# Altium PCB RYA_MotorDriver.PcbDoc
Units mm, origin at the board's own origin, x right, y up, seen from the top; angles counter-clockwise.
Board outline 42.67 x 29.5 mm, 2 copper layers (Top Layer, Bottom Layer); 33 components, 30 nets, 95 pads, 90 vias.
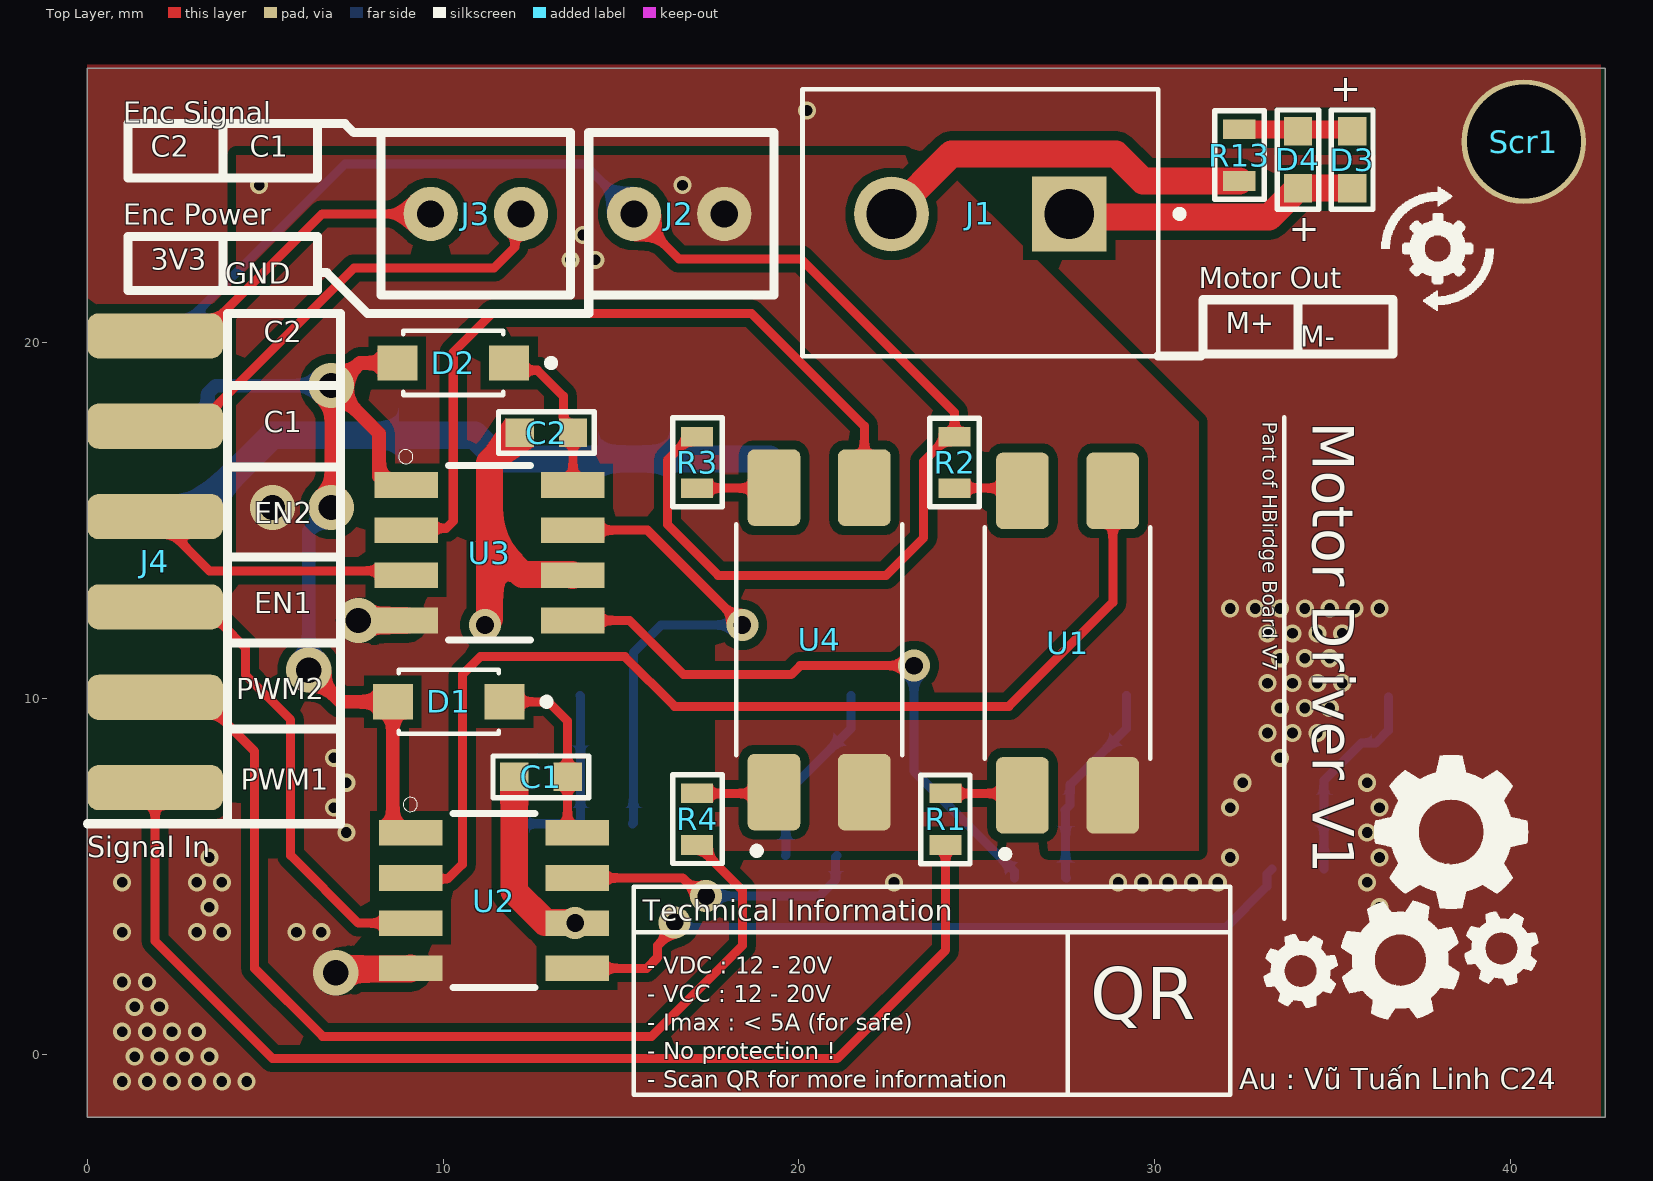
[diagram p0: Top Layer view]
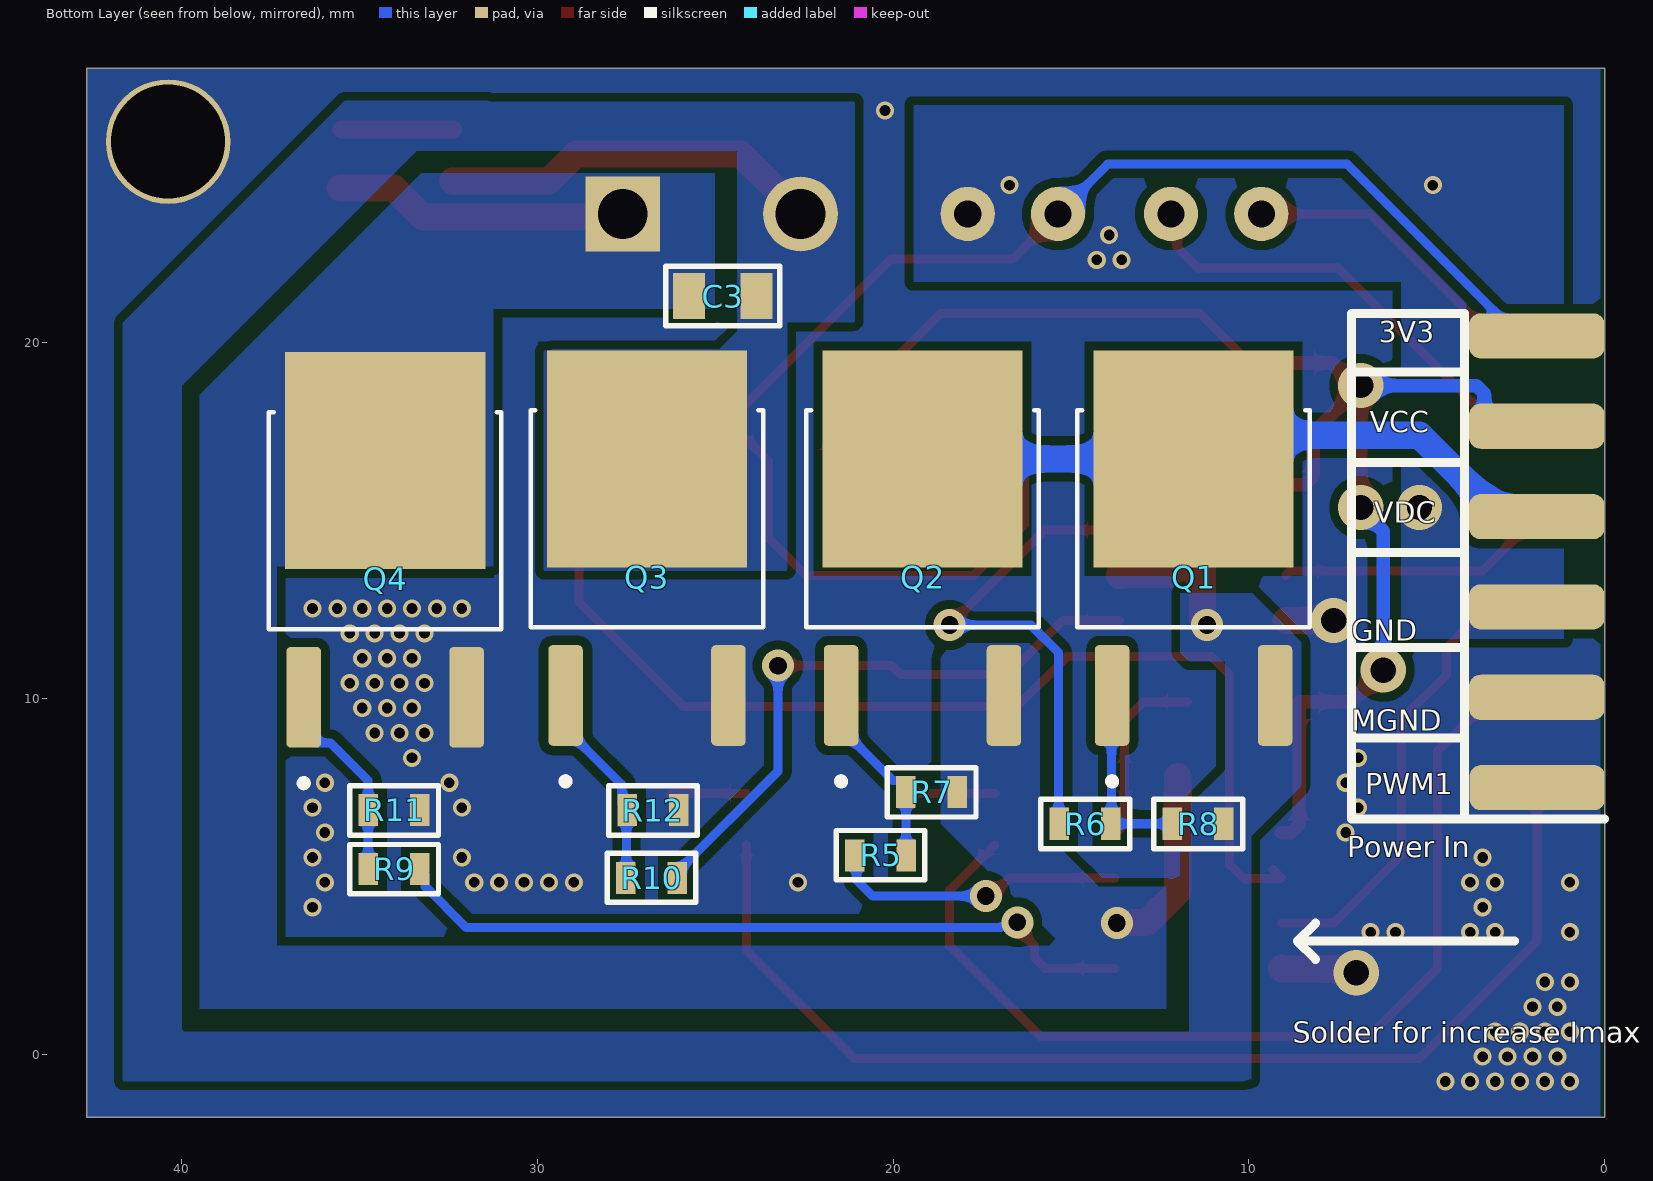
[diagram p1: Bottom Layer view, seen from below]
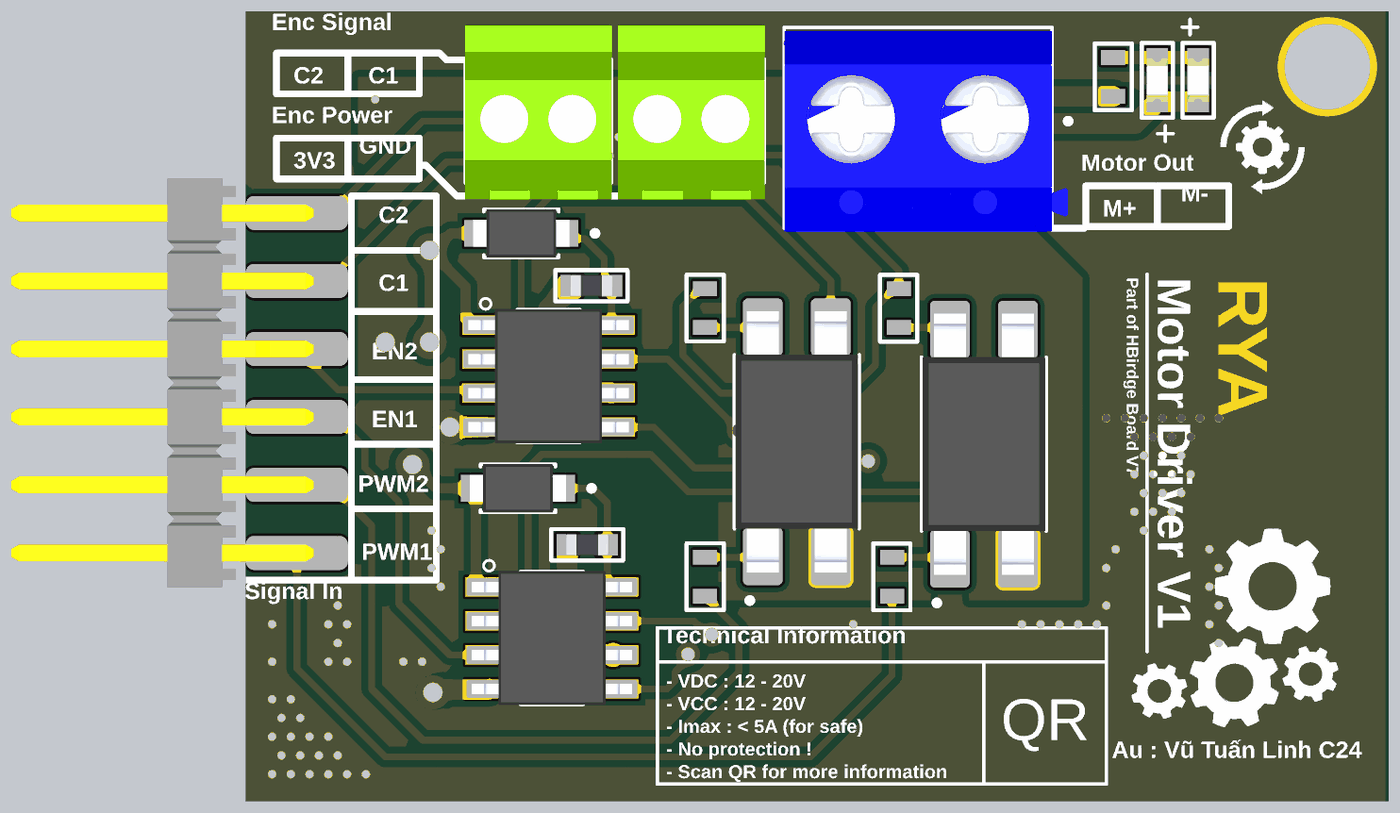
[diagram p2: 3D render of the assembled board from above, using the file's embedded part models]

## Layer stack, top to bottom
Top Solder: solder mask 0.0102, Solder Resist, Dk 3.5
Top Layer: signal copper 0.0356
Dielectric 1: dielectric 0.32, FR-4, Dk 4.8
Bottom Layer: signal copper 0.0356
Bottom Solder: solder mask 0.0102, Solder Resist, Dk 3.5

## Board outline
0,-1.778 0,27.722 42.672,27.722 42.672,-1.778

## Design rules (kind name [scope] priority, off if disabled: settings)
Clearance [All] p1: gap=0.254 ignorepadtopadclearanceinfootprint=FALSE
PolygonConnect [All] p1: connectstyle=Direct reliefconductorwidth=0.254 reliefentries=4 polygonreliefangle="90 Angle" airgapwidth=0.254
RoutingVias [All] p1: holewidth=0.711 width=1.27 viastyle="Through Hole" minholewidth=0.711 minwidth=1.27 maxholewidth=0.711 maxwidth=1.27
SolderMaskExpansion [All] p1: expansion=0.102 istentingtop=FALSE
SupplyNets "Schematic Supply Nets_5" [InNet('3V3')] p1: voltage=0.000
SupplyNets "Schematic Supply Nets_4" [InNet('MGND')] p2: voltage=0.000
SupplyNets "Schematic Supply Nets_3" [InNet('VDC')] p3: voltage=0.000
SupplyNets "Schematic Supply Nets_1" [InNet('GND')] p4: voltage=0.000
SupplyNets "Schematic Supply Nets" [InNet('VCC')] p5: voltage=0.000
Width "Schematic Width Constraint" [InNetClass('Motor Power')] p1: maxlimit=2.54 minlimit=0.762 preferedwidth=0.762
Width [All] p2: maxlimit=1.254 minlimit=0.254 preferedwidth=0.254
30 further rules are at their usual default settings.

## Classes and differential pairs
net class "Motor Power": MGND NetC1_2 NetC2_1 VDC
component class U_MotorDriver: C1 C2 C3 D1 D2 D3 D4 Q1 Q2 Q3 Q4 R1 R2 R3 R4 R5 R6 R7 R8 R9 R10 R11 R12 R13 U1 U2 U3 U4
component class TopLevelDesgin: J1 J2 J3 J4 Scr1

## Components (designator, comment, footprint, x,y, rotation, side; value= is the part's Value field where it differs from the comment)
C1 "010603226106.3" CAP_0603 12.7,7.874 r180 top value=22µF
C2 "010603226106.3" CAP_0603 12.954,17.399 r0 top value=22µF
C3 "0108051031050" CAP_0805 24.765,21.336 r180 bottom value=10nF
D1 "1N5819W" 1N5819W 10.16,9.906 r180 top
D2 "1N5819W" 1N5819W 10.287,19.431 r180 top
D3 "160603GreenClear" WL-SMCW_0603_H=0.7mm 35.56,25.146 r90 top value="Green, 3.2V"
D4 "160603BlueClear" WL-SMCW_0603_H=0.7mm 34.036,25.146 r270 top value="Blue, 3.2V"
J1 "KF301-2P" HANDSON_KF301-2P 25.106,23.622 r180 top
J2 "KF120-2" KF120-2-Footprint-1 17.907,23.622 r270 top
J3 "KF120-2" KF120-2-Footprint-1 12.192,23.622 r270 top
J4 "90StraightHeader" Header90Degree 1.905,20.193 r0 top
Q1 "IRLR7843TRPBF" TO229P990X239-3_4N 11.557,14.224 r90 bottom
Q2 "IRLR7843TRPBF" TO229P990X239-3_4N 19.177,14.224 r90 bottom
Q3 "IRLR7843TRPBF" TO229P990X239-3_4N 26.924,14.224 r90 bottom
Q4 "IRLR7843TRPBF" TO229P990X239-3_4N 34.286,14.173 r90 bottom
R1 "0006031011" resistor_0603 24.13,6.604 r90 top value="100 Ohm, 1/4 W"
R2 "0006031021" resistor_0603 24.384,16.637 r90 top value="1 KOhm, 1/4 W"
R3 "0006031021" resistor_0603 17.145,16.637 r270 top value="1 KOhm, 1/4 W"
R4 "0006031011" resistor_0603 17.145,6.604 r270 top value="100 Ohm, 1/4 W"
R5 "0006031011" resistor_0603 20.357,5.588 r180 bottom value="100 Ohm, 1/4 W"
R6 "0006031011" resistor_0603 14.605,6.477 r0 bottom value="100 Ohm, 1/4 W"
R7 "0006031031" resistor_0603 18.923,7.366 r0 bottom value="10 KOhm, 1/4 W"
R8 "0006031031" resistor_0603 11.43,6.477 r0 bottom value="10 KOhm, 1/4 W"
R9 "0006031011" resistor_0603 34.036,5.207 r0 bottom value="100 Ohm, 1/4 W"
R10 "0006031011" resistor_0603 26.797,4.953 r180 bottom value="100 Ohm, 1/4 W"
R11 "0006031031" resistor_0603 34.036,6.858 r0 bottom value="10 KOhm, 1/4 W"
R12 "0006031031" resistor_0603 26.76,6.858 r0 bottom value="10 KOhm, 1/4 W"
R13 "0006031021" resistor_0603 32.385,25.273 r270 top value="1 KOhm, 1/4 W"
Scr1 "MP3.2" MP3.2 40.386,25.654 r0 top
U1 "PC817X2NIP1B" SOIC254P960X420-4N 27.559,11.557 r90 top
U2 "IR2104SPBF" IR2104SPBF 11.43,4.318 r0 top
U3 "IR2104SPBF" IR2104SPBF 11.303,14.097 r0 top
U4 "PC817X2NIP1B" SOIC254P960X420-4N 20.574,11.646 r90 top

## Footprints (in the part's own frame and the unit in brackets; to place one, negate y for a bottom-side part, rotate by r counter-clockwise, add the part's x,y. Pads: shape width x height; smd on the part's side, far side on the other; paste and mask are expansions set on the pad)
1N5819W [mm]
  rect 1.12x0.99 smd: A(1.57,0) K(-1.57,0)
  silkscreen extent -2.85,-0.9 1.4,0.9, body extent -1.8,-0.9 1.8,0.9, height 1.1
CAP_0603 [mm]
  rect 0.8x0.8 smd: 1(-0.801,0.076) 2(0.699,0.076)
  silkscreen extent -1.4,-0.51 1.3,0.66, body extent -0.85,-0.32 0.75,0.48, height 0.8
CAP_0805 [mm]
  rect 0.9x1.3 smd: 1(-0.975,-0.025) 2(0.925,-0.025)
  silkscreen extent -1.63,-0.86 1.57,0.81, body extent -1.03,-0.65 0.97,0.6, height 0.6
HANDSON_KF301-2P [mm]
  rect 2.1x2.1 hole 1.4: 1(-2.5,0)
  round 2.1 hole 1.4: 2(2.5,0)
  silkscreen extent -5.7,-3.5 5,4, body extent -5.6,-3.37 5,4.13, height 10.13
Header90Degree [mm]
  rrect50% 3.81x1.27 smd: 1(0,0) 2(0,-2.54) 3(0,-5.08) 4(0,-7.62) 5(0,-10.16) 6(0,-12.7)
  rrect50% 3.81x1.27 smd far side: 7(-0.014,-12.701) 8(0,-10.16) 9(0,-7.62) 10(0,-5.08) 11(0,-2.54) 12(0,0)
  body extent -10.67,-13.97 0.64,1.27, height 2.54
IR2104SPBF [mm]
  rect 1.78x0.72 smd paste-2: 1(-2.34,1.905) 2(-2.34,0.635) 3(-2.34,-0.635) 4(-2.34,-1.905) 5(2.34,-1.905) 6(2.34,-0.635) 7(2.34,0.635) 8(2.34,1.905)
  silkscreen extent -2.55,-2.45 1.15,2.9, body extent -3,-2.5 3,2.5, height 1.75
KF120-2-Footprint-1 [mil]
  round 60 hole 30: 1(0,0) 2(0,-100)
  body extent -141,-158 115,58, height 335
MP3.2 [mm]
  round 3.5 hole 3.2: 1(0,0)
  body extent -2.75,-2.75 2.74,2.75, height 2.98
resistor_0603 [mm]
  rect 0.55x0.9 smd: 1(-0.725,0) 2(0.725,0)
  silkscreen extent -1.25,-0.69 1.24,0.7, body extent -0.8,-0.45 0.8,0.45, height 0.5
SOIC254P960X420-4N [mm]
  rrect25% 2.15x1.48 smd: 1(-4.28,1.27) 2(-4.28,-1.27) 3(4.28,-1.27) 4(4.28,1.27)
  silkscreen extent -6.03,-2.33 3.25,2.33, body extent -4.87,-2.29 4.87,2.29, height 4
TO229P990X239-3_4N [mm]
  rrect25% 2.83x0.97 smd: 1(-4.14,2.29) 3(-4.14,-2.29)
  rect 6.1x5.63 smd paste-4: 4(2.51,0)
  silkscreen extent -6.65,-3.27 3.87,3.27, body extent -4.95,-3.27 4.95,3.27, height 2.39
WL-SMCW_0603_H=0.7mm [mm] "SMD Mono-color Chip LED, body 1.6x0.8mm"
  rect 0.8x0.8 smd: 1(-0.8,0) 2(0.8,0)
  silkscreen extent -1.4,-0.58 1.4,0.58, body extent -0.8,-0.4 0.8,0.4, height 0.7

## Part data
C1 C2: library part CMP-001-00237-1, "CAP, size 0603, 22 uF, 6.3 VDC", Manufacture Name="Samsung Electro-Mechanics", Manufacture SN=CL10A226KQ8NRNE, Operating Temperature="-55 to +125degC", Tolerance=10%, Voltage Rating DC="6.3 VDC", Component Type=Standard, Design Item ID=010603226106.3, Mounting Technology=SMT, Packaging="Tape and Reel", Pins=2, Size=0603, Source=Capacitor_0603_10_percent.SchLib, Supplier 1 Name=Mouser, Supplier 1 SN=187-CL10A226KQ8NRNE, Supplier 1 URL=https://www.mouser.vn/ProductDetail/Samsung-Electro-Mechanics/CL10A226KQ8NRNE?qs=NrXEK%2Fuukt63rpgsAsB8kg%3D%3D&utm_source=mouser-refine-download&utm_medium=file&utm_campaign=CL10A226KQ8NRNE&utm_content=Samsung-Electro-Mechanics, Supplier 2 Name=Digi-Key, Supplier 2 SN=1276-2867-2-ND, Supplier 2 URL=https://www.digikey.com/en/products/detail/samsung-electro-mechanics/cl10a226kq8nrne/3888525, Supplier 3 Name=thegioiic, Supplier 3 SN=N/A, Supplier 3 URL=N/A
C3: library part CMP-001-00258-1, "CAP, size 0805, 10 nF, 50 VDC", Manufacture Name=TDK, Manufacture SN=CGA4C2C0G1H103J060AA, Operating Temperature="-55 to +125degC", Tolerance=5%, Voltage Rating DC="50 VDC", Component Type=Standard, Design Item ID=0108051031050, Mounting Technology=SMT, Packaging="Tape and Reel", Pins=2, Size=0805, Source=Capacitor_0805_5_percent.SchLib, Supplier 1 Name=Mouser, Supplier 1 SN=810-CGA4C2C0G1H103J, Supplier 1 URL=https://www.mouser.vn/ProductDetail/TDK/CGA4C2C0G1H103J060AA?qs=FxQuwy19cyC9M6v0nMqjhA%3D%3D&utm_source=mouser-refine-download&utm_medium=file&utm_campaign=CGA4C2C0G1H103J060AA&utm_content=TDK, Supplier 2 Name=Digi-Key, Supplier 2 SN=445-6947-2-ND, Supplier 2 URL=https://www.digikey.com/en/products/detail/tdk-corporation/cga4c2c0g1h103j060aa/2672840, Supplier 3 Name=thegioiic, Supplier 3 SN=OEM, Supplier 3 URL=N/A
D1 D2: library part CMP-004-00113-1, Component Type=Standard, Design Item ID=1N5819W, Pins=2, Source=1N5819W.SchLib
D3: library part CMP-004-00090-1, "WL-SMCW SMT Mono-color Chip LED Waterclear, size 0603, Green, 3.2V, 140deg", Color=Green, Component Type=Standard, ComponentLink1Description="Datasheet link", ComponentLink1URL=N/A, ComponentLink2Description="Supplier 1 URL", ComponentLink2URL=https://www.mouser.vn/ProductDetail/Wurth-Elektronik/150060GS75000?qs=LlUlMxKIyB0UYkq5lDO8nA%3D%3D, ComponentLink3Description="Supplier 2 URL", ComponentLink3URL=https://www.digikey.com/en/products/detail/liteon/LTST-C191KGKT/386835, ComponentLink4Description="Supplier 3 URL", ComponentLink4URL=https://www.thegioiic.com/led-xanh-la-0603-dan-smd-trong-suot, Design Item ID=160603GreenClear, Pins=2, Size=0603, Source=WL-SMCW_0603.SchLib, Supplier 1 Name=Mouser, Supplier 1 SN=710-150060GS75000, Supplier 1 URL=https://www.mouser.vn/ProductDetail/Wurth-Elektronik/150060GS75000?qs=LlUlMxKIyB0UYkq5lDO8nA%3D%3D, Supplier 2 Name=Digi-Key, Supplier 2 SN=160-1446-2-ND, Supplier 2 URL=https://www.digikey.com/en/products/detail/liteon/LTST-C191KGKT/386835, Supplier 3 Name=ICDayRoi, Supplier 3 SN=N/A, Supplier 3 URL=https://www.thegioiic.com/led-xanh-la-0603-dan-smd-trong-suot, Type=Clear
D4: library part CMP-004-00088-1, "WL-SMCW SMT Mono-color Chip LED Waterclear, size 0603, Blue, 3.2V, 140deg", Color=Blue, Component Type=Standard, ComponentLink1Description="Datasheet link", ComponentLink1URL=N/A, ComponentLink2Description="Supplier 1 URL", ComponentLink2URL=https://www.mouser.vn/ProductDetail/Wurth-Elektronik/150060BS75003?qs=Li%252BoUPsLEnu8LvIbM48DKA%3D%3D, ComponentLink3Description="Supplier 2 URL", ComponentLink3URL=https://www.digikey.com/en/products/detail/liteon/LTST-C191TBKT/388530, ComponentLink4Description="Supplier 3 URL", ComponentLink4URL=https://www.thegioiic.com/led-xanh-duong-0603-dan-smd-trong-suot, Design Item ID=160603BlueClear, Pins=2, Size=0603, Source=WL-SMCW_0603.SchLib, Supplier 1 Name=Mouser, Supplier 1 SN=710-150060GS75000, Supplier 1 URL=https://www.mouser.vn/ProductDetail/Wurth-Elektronik/150060BS75003?qs=Li%252BoUPsLEnu8LvIbM48DKA%3D%3D, Supplier 2 Name=Digi-Key, Supplier 2 SN=160-1647-2-ND, Supplier 2 URL=https://www.digikey.com/en/products/detail/liteon/LTST-C191TBKT/388530, Supplier 3 Name=ICDayRoi, Supplier 3 SN=N/A, Supplier 3 URL=https://www.thegioiic.com/led-xanh-duong-0603-dan-smd-trong-suot, Type=Clear
J1: library part CMP-118-000001-1, "2 Pin Terminal Block 5mm Pitch", Package=None, Availability=Unavailable, Design Item ID=KF301-2P, MP=KF301-2P, Price=None, Source=KF301-2P.SchLib
J2 J3: library part CMP-118-000003-2, "2.54mm Terminal"
J4: library part CMP-118-000004-6
Q1 Q2 Q3 Q4: library part CMP-123-000003-1, "RoHS Compliant", Package="TO-252-3 Infineon", Availability="In Stock", Check_prices=https://www.snapeda.com/parts/IRLR7843TRPBF/Infineon+Technologies/view-part/?ref=eda, Component Type=Standard, Design Item ID=IRLR7843TRPBF, MF="Infineon Technologies", MP=IRLR7843TRPBF, Pin Count=3, Price=None, Purchase-URL=https://pricing.snapeda.com/search/part/IRLR7843TRPBF/?ref=eda, SnapEDA_Link=https://www.snapeda.com/parts/IRLR7843TRPBF/Infineon+Technologies/view-part/?ref=snap, Source=IRLR7843TRPBF.SchLib
R1 R4 R5 R6 R9 R10: library part CMP-009-00184-1, "RES, size 0603, 100 Ohm, 1/4 W", Manufacture  Name=OEM, Rated Power="1/4 W", Resistance Tolerance=+/-1%, Component Type=Standard, ComponentLink1Description="Datasheet link", ComponentLink1URL=https://www.yageo.com/upload/media/product/productsearch/datasheet/rchip/PYu-SR_20105_RoHS_L_10.pdf, ComponentLink2Description="Supplier 1 URL", ComponentLink2URL=N/A, ComponentLink3Description="Supplier 2 URL", ComponentLink3URL=https://www.digikey.com/en/products/detail/yageo/SR0603FR-7T100RL/9373096https://www.digikey.com/en/products/detail/yageo/SR0603FR-7T100RL/9373096, ComponentLink4Description="Supplier 3 URL", ComponentLink4URL=N/A, Design Item ID=0006031011, Manufacture  SN=OEM, Mounting Technology=SMT, Pins=2, Size=0603, Source=Resistor_0603.SchLib, Supplier 1 Name=Mouser, Supplier 1 SN=603-SR0603FR-7T100RL, Supplier 1 URL=https://www.mouser.vn/ProductDetail/YAGEO/SR0603FR-7T100RL?qs=sGAEpiMZZMvdGkrng054tz1y1XEHv7sNOEBvi%2FAEoxbcgRjDGFawVw%3D%3D, Supplier 2 Name=Digi-Key, Supplier 2 SN="YAG5822TR-ND YAG5822CT-ND YAG5822DKR-ND", Supplier 2 URL=https://www.digikey.com/en/products/detail/yageo/SR0603FR-7T100RL/9373096https://www.digikey.com/en/products/detail/yageo/SR0603FR-7T100RL/9373096, Supplier 3 Name=thegioiic, Supplier 3 SN=N/A, Supplier 3 URL=N/A
R2 R3 R13: library part CMP-009-00186-1, "RES, size 0603, 1 KOhm, 1/4 W", Manufacture  Name=OEM, Rated Power="1/4 W", Resistance Tolerance=+/-1%, Component Type=Standard, ComponentLink1Description="Datasheet link", ComponentLink1URL=https://www.yageo.com/upload/media/product/productsearch/datasheet/rchip/PYu-SR_20105_RoHS_L_10.pdf, ComponentLink2Description="Supplier 1 URL", ComponentLink2URL=N/A, ComponentLink3Description="Supplier 2 URL", ComponentLink3URL=https://www.digikey.com/en/products/detail/yageo/SR0603FR-7T1KL/9373103, ComponentLink4Description="Supplier 3 URL", ComponentLink4URL=N/A, Design Item ID=0006031021, Manufacture  SN=OEM, Mounting Technology=SMT, Pins=2, Size=0603, Source=Resistor_0603.SchLib, Supplier 1 Name=Mouser, Supplier 1 SN=71-RCS06031K00FKEA, Supplier 1 URL=https://www.mouser.vn/ProductDetail/Vishay-Dale/RCS06031K00FKEA?qs=sGAEpiMZZMvdGkrng054t9clqp6gtJJdzI9PGMrTQi4RTIuHToNahw%3D%3D, Supplier 2 Name=Digi-Key, Supplier 2 SN="YAG5829TR-ND YAG5829CT-ND YAG5829DKR-ND", Supplier 2 URL=https://www.digikey.com/en/products/detail/yageo/SR0603FR-7T1KL/9373103, Supplier 3 Name=thegioiic, Supplier 3 SN=N/A, Supplier 3 URL=N/A
R7 R8 R11 R12: library part CMP-009-00188-1, "RES, size 0603, 10 KOhm, 1/4 W", Manufacture  Name=OEM, Rated Power="1/4 W", Resistance Tolerance=+/-1%, Component Type=Standard, ComponentLink1Description="Datasheet link", ComponentLink1URL=https://fscdn.rohm.com/en/products/databook/datasheet/passive/resistor/chip_resistor/esr-e.pdf, ComponentLink2Description="Supplier 1 URL", ComponentLink2URL=N/A, ComponentLink3Description="Supplier 2 URL", ComponentLink3URL=https://www.digikey.com/en/products/detail/rohm-semiconductor/ESR03EZPF1002/1983429, ComponentLink4Description="Supplier 3 URL", ComponentLink4URL=N/A, Design Item ID=0006031031, Manufacture  SN=OEM, Mounting Technology=SMT, Pins=2, Size=0603, Source=Resistor_0603.SchLib, Supplier 1 Name=Mouser, Supplier 1 SN=755-ESR03EZPF1002, Supplier 1 URL=https://www.mouser.vn/ProductDetail/ROHM-Semiconductor/ESR03EZPF1002?qs=sGAEpiMZZMvdGkrng054t67Efho1F8r6CDeAsqwFse8%3D, Supplier 2 Name=Digi-Key, Supplier 2 SN="RHM10KADTR-ND RHM10KADCT-ND RHM10KADDKR-ND", Supplier 2 URL=https://www.digikey.com/en/products/detail/rohm-semiconductor/ESR03EZPF1002/1983429, Supplier 3 Name=thegioiic, Supplier 3 SN=N/A, Supplier 3 URL=N/A
Scr1: library part CMP-143-000000-1, Component Type=Standard, Design Item ID=MP3.2, Pin Count=1, Source=MP_3P2.SchLib
U1 U4: library part CMP-036-000026-1, "Optocoupler DC-IN 1-CH Transistor DC-OUT 4-Pin DIP SMD T/R", Package="SMD-4 Sharp Microelectronics", Check_prices=https://www.snapeda.com/parts/PC817X2NIP1B/Sharp+Microelectronics/view-part/?ref=eda, Design Item ID=PC817X2NIP1B, MF="Sharp Microelectronics", MP=PC817X2NIP1B, SnapEDA_Link=https://www.snapeda.com/parts/PC817X2NIP1B/Sharp+Microelectronics/view-part/?ref=snap, Source=PC817X2NIP1B.SchLib
U2 U3: library part CMP-031-00014-2, "Half-Bridge Gate Driver IC Non-Inverting 8-SOIC", Case/Package="SOIC-8 Infineon", Check_prices=https://www.snapeda.com/parts/IR2104SPBF/Infineon/view-part/?ref=eda, Component Type=Standard, Design Item ID=IR2104SPBF, MF=Infineon, MP=IR2104SPBF, Pins=8, SnapEDA_Link=https://www.snapeda.com/parts/IR2104SPBF/Infineon/view-part/?ref=snap, Source=IR2104SPBF.SchLib

## Via types
v1: diameter 0.508, hole 0.3, Top Layer to Bottom Layer, tented both sides, 78 vias
v2: diameter 1.27, hole 0.711, Top Layer to Bottom Layer, tented both sides, 6 vias
v3: diameter 0.9, hole 0.5, Top Layer to Bottom Layer, tented both sides, 5 vias
v4: diameter 0.9, hole 0.5, Top Layer to Bottom Layer, 1 vias

## Nets (pads, with @x,y where several pads share a name; then routed paths per layer and width w, separated by ;. In a path a pad name is that pad's centre, name@x,y a point inside that pad or via, vN(x,y) a via of type N, cw(c..) or ccw(c..) an arc to the next point about the centre after c; other vN are vias at no path point)
3V3: J2.2 J4.12 R2.2 R3.1 | length 42.5
  Top Layer w0.254: J2.2 16.637,22.352 20.066,22.352 24.384,18.034 R2.2 24.209,17.362 23.513,16.666 23.513,14.518 22.457,13.462 17.736,13.462 16.314,14.884 16.314,16.706 16.97,17.362 R3.1
  Bottom Layer w0.254: J4.12 2.413,20.193 7.239,25.019 13.97,25.019 J2.2
EN1: J4.4 U2.3 | length 13.5
  Top Layer w0.254: J4.4 2.137,12.341 3.51,12.341 3.772,12.079 3.796,12.079 4.445,11.43 4.445,10.668 5.715,9.398 5.715,5.588 7.62,3.683 U2.3
EN2: J4.3 U3.3 | length 7.7
  Top Layer w0.254: J4.3 3.429,13.589 8.836,13.589 U3.3
ENC_C1: J3.1 J4.2 | length 13.2
  Top Layer w0.254: J4.2 3.072,17.653 3.669,18.25 3.669,18.274 7.493,22.098 11.43,22.098 12.019,22.687 12.019,23.449 J3.1
ENC_C2: J3.2 J4.1 | length 9.2
  Top Layer w0.254: J4.1 3.175,20.193 6.604,23.622 J3.2
GND: J2.1 J4.9 U1.2 U4.2
  other v1: 13.58,22.33 14.28,22.33 13.93,23.03 4.83,24.43 16.73,24.43
  other v2: 5.207,15.367
MGND: J4.7 J4.8 Q3.3 Q4.3 R11.1 R12.1 Scr1.1 U2.4 U3.4 | length 3.5
  Top Layer w0.762: v2(6.985,2.286) 7.122,2.286 7.228,2.392 9.069,2.392 U2.4 ; v2(7.62,12.192) U3.4
  other v1: 0.98,-0.77 1.68,-0.77 2.38,-0.77 3.08,-0.77 3.78,-0.77 4.48,-0.77 1.33,-0.07 2.03,-0.07 2.73,-0.07 3.43,-0.07 0.98,0.63 1.68,0.63 2.38,0.63 3.08,0.63 1.33,1.33 2.03,1.33 0.98,2.03 1.68,2.03 0.98,3.43 3.08,3.43 3.78,3.43 5.88,3.43 6.58,3.43 3.43,4.13 36.33,4.13 0.98,4.83 3.08,4.83 3.78,4.83 22.68,4.83 28.98,4.83 29.68,4.83 30.38,4.83 31.08,4.83 31.78,4.83 35.98,4.83 3.43,5.53 32.13,5.53 36.33,5.53 7.28,6.23 35.98,6.23 6.93,6.93 32.13,6.93 36.33,6.93 7.28,7.63 32.48,7.63 35.98,7.63 6.93,8.33 33.53,8.33 33.18,9.03 33.88,9.03 34.58,9.03 33.53,9.73 34.23,9.73 34.93,9.73 33.18,10.43 33.88,10.43 34.58,10.43 35.28,10.43 33.53,11.13 34.23,11.13 34.93,11.13 33.18,11.83 33.88,11.83 34.58,11.83 35.28,11.83 32.13,12.53 32.83,12.53 33.53,12.53 34.23,12.53 34.93,12.53 35.63,12.53 36.33,12.53 20.23,26.53
NetC1_1: C1.1 D1.K U2.8 | length 5.3
  Top Layer w0.254: D1.K 12.954,9.906 13.501,9.359 C1.1 13.501,6.456 13.734,6.223 U2.8
NetC1_2: C1.2 C3.1 D3.1 D4.2 J1.1 Q2.3 Q4.4 R7.1 U2.6 | length 13.7
  Top Layer w0.762: C1.2 12.001,4.574 12.871,3.704 U2.6@13.749,3.704 ; J1.1 27.696,23.532 33.222,23.532 D4.2 D3.1
  other v4: 13.716,3.683
NetC2_1: C2.1 C3.2 J1.2 Q1.3 Q3.4 R8.1 R13.2 U3.6 | length 19.3
  Top Layer w0.762: v3(11.176,12.065) 11.176,12.102 11.303,12.229 11.303,14.416 ; C2.1 11.303,16.625 11.303,14.416 ; U3.6 13.622,13.483 12.236,13.483 11.303,14.416 ; J1.2 24.291,25.307 28.919,25.307 29.678,24.548 R13.2
NetC2_2: C2.2 D2.K U3.8 | length 4.5
  Top Layer w0.254: D2.K 12.06,19.228 12.649,19.228 13.38,18.497 13.38,17.748 C2.2 13.653,16.012 U3.8
NetD3_2: D3.2 D4.1 R13.1 | length 3.2
  Top Layer w0.254: D3.2@35.508,25.998 D3.2
  Top Layer w0.508: R13.1 D3.2@35.508,25.998
NetQ1_1: Q1.1 R6.1 R8.2 | length 5.3
  Bottom Layer w0.254: R8.2 R6.1 13.864,6.493 13.864,10.068 Q1.1
NetQ2_1: Q2.1 R5.2 R7.2 | length 5.4
  Bottom Layer w0.254: R5.2 19.64,5.596 19.64,7.533 19.796,7.689 20.002,7.689 21.467,9.154 Q2.1
NetQ3_1: Q3.1 R10.1 R12.2 | length 5.9
  Bottom Layer w0.254: R10.1 27.503,4.972 27.503,6.84 R12.2 27.633,7.006 27.633,7.573 29.214,9.154 Q3.1
NetQ4_1: Q4.1 R9.2 R11.2 | length 5.8
  Bottom Layer w0.254: R9.2 34.761,7.689 35.817,8.745 36.218,8.745 36.576,9.103 Q4.1
NetR1_2: R1.2 U1.1 | length 2.2
  Top Layer w0.254: R1.2 26.237,7.329 U1.1
NetR2_1: R2.1 U1.4 | length 1.9
  Top Layer w0.254: R2.1 26.214,15.912 U1.4
NetR3_2: R3.2 U4.4 | length 2.2
  Top Layer w0.254: R3.2 19.29,15.912 U4.4
NetR4_1: R4.1 U4.1 | length 2.2
  Top Layer w0.254: R4.1 19.267,7.329 U4.1
NetR5_1: R5.1 U2.7 | length 8.4
  Top Layer w0.254: U2.7 16.732,4.953 17.24,4.445 v3(17.399,4.445)
  Bottom Layer w0.254: v3(17.399,4.445) 20.574,4.445 21.035,4.906 21.035,5.541 R5.1
NetR6_2: R6.2 U3.7 | length 14.1
  Top Layer w0.254: U3.7 15.748,14.732 v3(18.415,12.065)
  Bottom Layer w0.254: R6.2 15.349,6.496 15.349,11.285 16.129,12.065 v3(18.415,12.065)
NetR9_1: R9.1 U2.5 | length 21.3
  Top Layer w0.254: U2.5 15.726,2.413 16.03,2.716 16.03,3.049 16.512,3.531 v3(16.512,3.706)
  Bottom Layer w0.254: v3(16.512,3.706) 16.636,3.583 16.958,3.583 16.984,3.556 32.004,3.556 33.163,4.715 33.163,5.059 R9.1
NetR10_2: R10.2 U3.5 | length 17.5
  Top Layer w0.254: U3.5 15.24,12.192 16.764,10.668 19.788,10.668 20.042,10.922 v3(23.241,10.922)
  Bottom Layer w0.254: v3(23.241,10.922) 23.241,7.959 26.072,5.128 R10.2
NetU1_3: U1.3 U2.2 | length 30.7
  Top Layer w0.254: U2.2@9.322,5.185 U2.2 9.112,4.931 10.138,4.931 10.541,5.334 10.541,10.668 11.049,11.176 15.113,11.176 16.51,9.779 25.908,9.779 28.829,12.7 U1.3
NetU3_2: U3.2 U4.3 | length 21.2
  Top Layer w0.254: U3.2 9.015,14.784 10.085,14.784 10.287,14.986 10.287,19.729 11.386,20.828 18.669,20.828 21.844,17.653 U4.3
PWM1: J4.6 R1.1 | length 32.1
  Top Layer w0.254: J4.6 1.905,3.175 5.207,-0.127 21.082,-0.127 24.13,2.921 R1.1
PWM2: J4.5 R4.2 | length 28.4
  Top Layer w0.254: J4.5 3.175,10.033 4.699,8.509 4.699,2.413 6.613,0.499 15.866,0.499 18.415,3.048 18.415,4.609 R4.2
VCC: D1.A D2.A J4.11 U2.1 U3.1 | length 26.7
  Top Layer w0.381: v2(6.223,10.795) 7.112,9.906 D1.A 8.59,6.456 8.823,6.223 U2.1 ; v2(6.858,15.367) v2(6.858,18.796) 7.025,18.796 7.66,19.431 D2.A ; v2@6.941,18.713 8.2,17.454 8.2,16.235 8.433,16.002 U3.1
  Bottom Layer w0.381: J4.11 2.951,17.653 3.385,18.088 3.385,18.573 3.609,18.796 v2(6.858,18.796) ; v2(6.223,10.795) 6.223,14.699 6.858,15.334 v2(6.858,15.367)
VDC: J4.10 Q1.4 Q2.4 | length 18.6
  Bottom Layer w0.762: J4.10 3.175,15.113 3.429,15.367 3.429,15.621 5.207,17.399 10.892,17.399 Q1.4 Q2.4

## Polygon pours and split planes (outlines as drawn)
NetC2_1 on Bottom Layer "NETC2_1_L02_P016" (solid, pour order 16): 21.108,20.574 21.082,20.6 21.082,26.771 31.343,26.771 31.369,26.797 35.433,26.797 41.656,20.574 41.656,-0.762 9.932,-0.762 9.906,-0.736 9.936,-0.706 9.936,6.122 8.525,7.533 8.525,11.573 9.906,12.954 11.932,12.954 11.932,11.309 11.938,11.303 11.684,11.049 10.668,11.049 10.668,7.993 11.684,6.977 11.684,0.635 39.942,0.635 40.005,0.698 40.005,18.796 33.401,25.4 24.384,25.4 24.384,20.32 24.892,19.812 29.819,19.812 29.845,19.786 29.819,19.761 29.819,13.589 23.013,13.589 22.987,13.615 22.987,20.574
NetC1_2 on Bottom Layer "NETC1_2_L02_P015" (solid, pour order 15): 33.274,24.765 39.497,18.542 39.497,1.27 12.319,1.27 12.319,4.699 14.224,4.699 15.875,6.35 15.875,11.557 18.669,11.557 18.669,6.477 15.43,3.238 15.621,3.048 37.338,3.048 37.338,13.716 31.242,13.716 31.242,20.955 25.019,20.955 25.019,24.765
MGND on Bottom Layer "MGND_L02_P002" (solid, remove dead copper, pour order 2): 0.127,10.795 0.127,27.722 42.672,27.722 42.672,-1.778 0.127,-1.778
GND on Bottom Layer "GND_L02_P001" (solid, pour order 1): 1.143,26.67 19.431,26.67 19.431,21.717 5.715,21.717 5.715,11.684 1.143,11.684
MGND on Top Layer "MGND_L01_P010" (solid, remove dead copper, pour order 10): 42.545,27.813 42.545,-1.778 0,-1.778 0,27.813
GND on Top Layer "GND_L01_P008" (solid, pour order 8): 17.653,13.97 4.191,13.97 4.191,25.273 23.749,25.273 31.242,17.78 31.242,5.715 17.653,5.715
NetC2_1 on Bottom Solder "NETC2_1_L02_P014" (solid, pour order 14): 21.108,20.574 21.082,20.6 21.082,26.771 31.343,26.771 31.369,26.797 35.433,26.797 41.656,20.574 41.656,-0.762 9.932,-0.762 9.906,-0.736 9.936,-0.706 9.936,6.122 8.525,7.533 8.525,11.573 9.906,12.954 11.932,12.954 11.932,11.309 11.938,11.303 11.684,11.049 10.668,11.049 10.668,7.993 11.684,6.977 11.684,0.635 39.942,0.635 40.005,0.698 40.005,18.796 33.401,25.4 24.384,25.4 24.384,20.32 24.892,19.812 29.819,19.812 29.845,19.786 29.819,19.761 29.819,13.589 23.013,13.589 22.987,13.615 22.987,20.574
NetC1_2 on Bottom Solder "NETC1_2_L02_P013" (solid, pour order 13): 33.274,24.765 39.497,18.542 39.497,1.27 12.319,1.27 12.319,4.699 14.224,4.699 15.875,6.35 15.875,11.557 18.669,11.557 18.669,6.477 15.43,3.238 15.621,3.048 37.338,3.048 37.338,13.716 31.242,13.716 31.242,20.955 25.019,20.955 25.019,24.765

## Silkscreen, mask and mechanical layers (free items; w line width, h text height)
Top Overlay:
  drawing of 56 lines, arcs and shapes, not listed
  text "Enc Signal" at 1.016,25.988 h1
  text "C2" at 1.778,25.03 h1
  text "C1" at 4.572,25.03 h1
  text "Enc Power" at 1.016,23.114 h1
  text "3V3" at 1.778,21.856 h1
  text "GND" at 3.873,21.463 h1
  text "Motor Out" at 31.242,21.336 h1
  text "M+" at 32.004,20.066 h1
  text "C2" at 4.953,19.823 h1
  text "M-" at 34.099,19.685 h1
  text "Part of HBirdge Board V7" at 32.898,17.78 h0.7 r270
  text "Motor Driver V1" at 34.056,17.78 h2 r270
  text "C1" at 4.953,17.283 h1
  text "EN2" at 4.699,14.732 h1
  text "EN1" at 4.699,12.192 h1
  text "PWM2" at 4.191,9.779 h1
  text "PWM1" at 4.318,7.239 h1
  text "Signal In" at 0,5.334 h1
  text "Technical Information" at 15.621,3.556 h1
  text "QR" at 28.194,0.506 h2.5
  text "- VDC : 12 - 20V  / - VCC : 12 - 20V  / - Imax : < 5A (for safe) / - No protection ! / - Scan QR for more information" at 15.748,-1.096 h0.8
  text "Au : Vũ Tuấn Linh C24" at 32.385,-1.18 h1
Bottom Overlay:
  lines w0.254: 0,6.604 3.937,6.604 ; 2.54,3.175 8.636,3.175 ; 3.937,8.89 7.112,8.89 ; 3.937,11.43 7.112,11.43 ; 3.937,14.097 7.112,14.097 ; 3.937,16.637 7.112,16.637 ; 3.937,19.177 7.112,19.177 ; 8.128,2.667 8.636,3.175 ; 8.128,3.683 8.636,3.175 ; 3.937,6.604 7.112,6.604 7.112,20.828 3.937,20.828 3.937,6.604
  text "3V3" at 6.35,19.824 h1
  text "VCC" at 6.604,17.283 h1
  text "VDC" at 6.477,14.743 h1
  text "GND" at 7.112,11.43 h1
  text "MGND" at 7.112,8.89 h1
  text "PWM1" at 6.731,7.112 h1
  text "Power In" at 7.239,5.334 h1
  text "Solder for increase Imax" at 8.763,0.127 h1
Top Solder:
  text "RYA" at 36.322,17.78 h3 r270
Drill Guide:
  the board outline again, w0.254

## Text inside footprints (layer, text, board x,y; h text height)
D3: Top Overlay "+" at 35.814,27.432 h0.76 r180
D4: Top Overlay "+" at 33.782,22.86 h0.76